# EAGLE board awecont_shield_schematic (EAGLE 6.1)

Size 53.01 x 44.44 mm. Coordinates in mm from the lower left corner, seen from the top.
Outline: 0,0 53.01,0 53.01,44.44 0,44.44 0,0
Copper layers (1*16): Top 0.035mm / dielectric 1.5mm / Bottom 0.035mm
Design rules: minimum track width 10mil, minimum drill 24mil, track to track 8mil, track to pad 8mil, pad to pad 8mil, via to via 8mil, smd to smd 8mil, copper to edge 40mil, drill to drill 8mil, minimum pad ring 10mil, minimum via ring 8mil, stop-mask expansion 4mil, vias tented up to drill 0mil, thermal gap 10mil

## Footprints (pad centres in the part's own frame; a part is rotated, then mirrored left to right if it is on the bottom)
LTE-302 = drill 0.8: A 1.27,0; C -1.27,0
AXIAL-0.3 = drill 0.9 pad 1.88: P$1 -3.81,0; P$2 3.81,0
SKHMPXE010 = smd 1.6 x 1.4: 1 -4.2,2.25; 2 4.2,2.25; 3 -4.2,-2.25; 4 4.2,-2.25; 5 4.2,0
BUZZER-12MM-NS = drill 0.9: + 3.25,0; - -3.25,0
DUEMILANOVE_VIAS = drill 1.016 pad 1.88: 3.3V 50.8,13.97; 5V 50.8,16.51; A0 50.8,29.21; A1 50.8,31.75; A2 50.8,34.29; A3 50.8,36.83; A4 50.8,39.37; A5 50.8,41.91; AREF 2.54,2.54; D2 2.54,36.83; D3 2.54,34.29; D4 2.54,31.75; D5 2.54,29.21; D6 2.54,26.67; D7 2.54,24.13; D8 2.54,20.32; D9 2.54,17.78; D10 2.54,15.24; D11 2.54,12.7; D12 2.54,10.16; D13 2.54,7.62; GND@0 50.8,19.05; GND@1 50.8,21.59; GND@2 2.54,5.08; RES 50.8,11.43; RX 2.54,41.91; TX 2.54,39.37; VIN 50.8,24.13
DIN7 = drill 0.9: 1 1.3,-3.8; 2 -1.3,-3.8; 3 -3.4,-3.8; 4 3.4,-3.8; 5 -3.4,-6.3; 6 0.9,-6.3; 7 3.4,-6.3 | drill 2.2: P$1 0,0; P$2 -6.75,-0.8; P$3 6.75,-0.8
RN42 = smd 0.8 x 1.3: 1 -3.2,-6.7; 2 -2,-6.7; 3 -0.8,-6.7; 4 0.4,-6.7; 5 1.6,-6.7; 6 2.8,-6.7; 7 4,-6.7; 8 5.2,-6.7; 9 6.4,-6.7; 10 7.6,-6.7; 11 8.8,-6.7; 12 10,-6.7; 13 10,6.7; 14 8.8,6.7; 15 7.6,6.7; 16 6.4,6.7; 17 5.2,6.7; 18 4,6.7; 19 2.8,6.7; 20 1.6,6.7; 21 0.4,6.7; 22 -0.8,6.7; 23 -2,6.7; 24 -3.2,6.7; P$1 12.1,6.05; P$10 12.1,-6.05; P$35 -6.9,-6.05; P$36 -6.9,6.05 | smd 1.3 x 0.8: 28 12.8,3.1; 29 12.8,-3.1; 30 12.8,4.1; 31 12.8,1.8; 32 12.8,0.6; 33 12.8,-0.6; 34 12.8,-1.8; 35 12.8,-4.1

## Placement (x,y rotation side)
D1  [LTE-302]  34.29,12.7 180 top
D2  [LTE-302]  34.29,3.81 180 top
R1  [AXIAL-0.3]  22.86,7.62 90 top
R2  [AXIAL-0.3]  43.18,12.7 0 top
R3  20K  [AXIAL-0.3]  16.51,16.51 0 top
R4  10K  [AXIAL-0.3]  16.51,20.32 0 top
R5  [AXIAL-0.3]  43.18,3.81 0 top
R6  [AXIAL-0.3]  43.18,10.16 0 top
S1  SKHMPSE010  [SKHMPXE010]  44.45,35.56 270 top
SG1  BUZZERNS  [BUZZER-12MM-NS]  13.97,7.62 0 top
U1  ARDUINO_SHIELDNO_SILK  [DUEMILANOVE_VIAS]  0,0 0 top
U$1  DIN7  [DIN7]  13.97,41.91 0 top
U$2  RN42  [RN42]  31.75,29.21 90 top

## Library data of the parts
D1 D2 = SparkFun-LED
R1-R6 = SparkFun-Passives
S1 = switch
SG1 = SparkFun-Electromechanical
U1 = SparkFun-Boards
U$1 = SparkFun-Connectors
U$2 = WirelessHandSensor

## Nets
3.3V: D1.A D2.A R6.P$1 U1.3.3V U$2.30 U$2.35
5V: U1.5V
GND: R1.P$1 R3.P$2 S1.1 S1.2 S1.5 SG1.- U1.GND@0 U1.GND@1 U1.GND@2 U$1.7 U$2.1 U$2.12 U$2.28 U$2.29
N$1: U1.D2 U$1.1
N$2: U1.D3 U$1.2
N$3: U1.D4 U$1.3
N$4: U1.D5 U$1.4
N$5: U1.D6 U$1.5
N$6: U1.D7 U$1.6
N$8: R1.P$2 SG1.+ U1.A0
N$9: D1.C R2.P$1
N$13: U$2.7
N$16: U$2.10
N$18: R3.P$1 R4.P$2
N$21: D2.C R5.P$1
N$25: U$2.24
N$26: U$2.2
N$27: U$2.18
PIO2: U1.A1 U$2.19
PIO3: U1.D8 U$2.20
PIO4: U1.D9 U$2.22
PIO5: R2.P$2 U$2.21
PIO6: U1.D10 U$2.3
PIO7: U1.D11 U$2.4
PIO8: R5.P$2 U$2.31
PIO9: U$2.32
PIO10: U$2.33
PIO11: U$2.34
RESET: S1.3 S1.4 U1.RES U$2.5
UARTCTS: R6.P$2 U1.A2 U$2.16
UARTRX: R4.P$1 U1.D12
UARTTX: U1.D13 U$2.14

## Tracks (layer width: path | path; a pad name or v marks a point on that pad's centre or on a via)
3.3V  (5 unrouted)
GND  (13 unrouted)
N$1  (1 unrouted)
N$2  (1 unrouted)
N$3  (1 unrouted)
N$4  (1 unrouted)
N$5  (1 unrouted)
N$6  (1 unrouted)
N$8  (2 unrouted)
N$9  (1 unrouted)
N$18  (1 unrouted)
N$21  (1 unrouted)
PIO2  (1 unrouted)
PIO3  (1 unrouted)
PIO4  (1 unrouted)
PIO5  (1 unrouted)
PIO6  (1 unrouted)
PIO7  (1 unrouted)
PIO8  (1 unrouted)
RESET  (3 unrouted)
UARTCTS  (2 unrouted)
UARTRX  (1 unrouted)
UARTTX  (1 unrouted)